# Altium PCB DX-LR20&30_PCB_Footprint_AD.PcbDoc
Units mil, origin at the board's own origin, x right, y up, seen from the top; angles counter-clockwise.
Board outline 6000 x 4000 mil, 2 copper layers (Top Layer, Bottom Layer); 1 components, 0 nets, 22 pads, 0 vias.
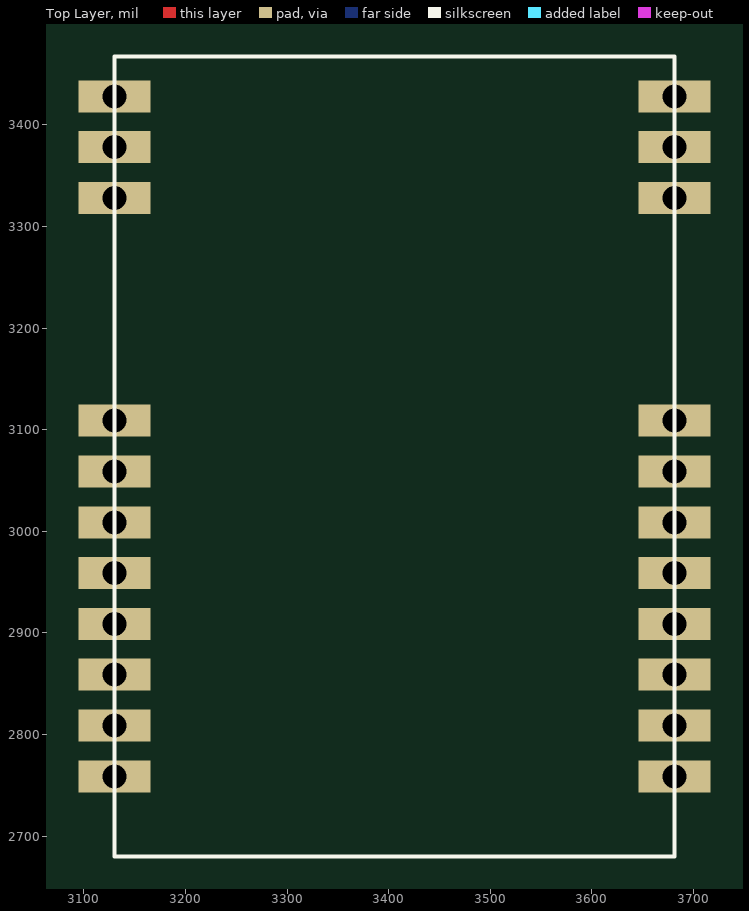
[diagram p0: Top Layer view]
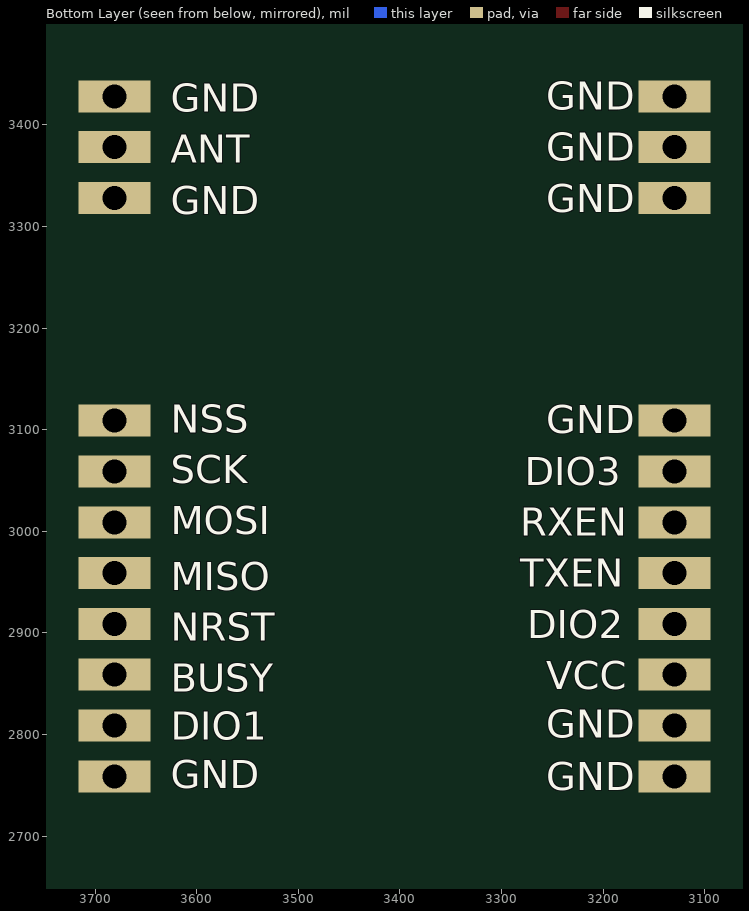
[diagram p1: Bottom Layer view, seen from below]

## Layer stack, top to bottom
Top Solder: solder mask 0.4, Solder Resist, Dk 3.5
Top Layer: signal copper 1.4
Dielectric 1: dielectric 12.6, FR-4, Dk 4.8
Bottom Layer: signal copper 1.4
Bottom Solder: solder mask 0.4, Solder Resist, Dk 3.5

## Board outline
1000,1000 7000,1000 7000,5000 1000,5000

## Design rules (kind name [scope] priority, off if disabled: settings)
Clearance [All] p1: gap=10 ignorepadtopadclearanceinfootprint=FALSE except(0: Arc-Hole Track-Hole SMDPad-Hole THPad-Hole Via-Hole Fill-Hole Poly-Hole Region-Hole Text-Hole)
PolygonConnect [All] p1: connectstyle=Relief reliefconductorwidth=10 reliefentries=4 polygonreliefangle="90 Angle" airgapwidth=10
RoutingVias [All] p1: holewidth=28 width=50 viastyle="Through Hole" minholewidth=28 minwidth=50 maxholewidth=28 maxwidth=50
SolderMaskExpansion [All] p1: expansion=4 istentingtop=FALSE
Width [All] p1: maxlimit=10 minlimit=10 preferedwidth=10
30 further rules are at their usual default settings.

## Components (designator, comment, footprint, x,y, rotation, side; value= is the part's Value field where it differs from the comment)
U? "" PE220-400M22S 3130,3428.03 r90 top

## Footprints (in the part's own frame and the unit in brackets; to place one, negate y for a bottom-side part, rotate by r counter-clockwise, add the part's x,y. Pads: shape width x height; smd on the part's side, far side on the other; paste and mask are expansions set on the pad)
PE220-400M22S [mm] "20mm*14mm*2.8mm-S"
  rect 0.8x1.8 hole 0.6: 1(0,0) 2(-1.27,0) 3(-2.54,0) 4(-8.11,0) 5(-9.38,0) 6(-10.65,0) 7(-11.92,0) 8(-13.19,0) 9(-14.46,0) 10(-15.73,0) 11(-17,0) 12(-17,-14) 13(-15.73,-14) 14(-14.46,-14) 15(-13.19,-14) 16(-11.92,-14) 17(-10.65,-14) 18(-9.38,-14) 19(-8.11,-14) 20(-2.54,-14) 21(-1.27,-14) 22(0,-14)
  silkscreen extent -19,-14 1,0

## Part data
U?: library part LLCC68

## Nets (pads, with @x,y where several pads share a name; then routed paths per layer and width w, separated by ;. In a path a pad name is that pad's centre, name@x,y a point inside that pad or via, vN(x,y) a via of type N, cw(c..) or ccw(c..) an arc to the next point about the centre after c; other vN are vias at no path point)
pads on no net: U?.1 U?.2 U?.3 U?.4 U?.5 U?.6 U?.7 U?.8 U?.9 U?.10 U?.11 U?.12 U?.13 U?.14 U?.15 U?.16 U?.17 U?.18 U?.19 U?.20 U?.21 U?.22

## Text inside footprints (layer, text, board x,y; h text height)
U?: Bottom Overlay "GND" at 3625.83,2746.97 h27.56; Bottom Overlay "DIO1" at 3625.83,2794.57 h27.56; Bottom Overlay "BUSY" at 3625.83,2841.97 h27.56; Bottom Overlay "NRST" at 3625.83,2891.97 h27.56; Bottom Overlay "MISO" at 3625.83,2941.97 h27.56; Bottom Overlay "MOSI" at 3625.83,2996.97 h27.56; Bottom Overlay "SCK" at 3625.83,3046.97 h27.56; Bottom Overlay "NSS" at 3625.83,3096.97 h27.56; Bottom Overlay "GND" at 3625.83,3312.06 h27.56; Bottom Overlay "ANT" at 3625.83,3362.41 h27.56; Bottom Overlay "GND" at 3625.83,3412.76 h27.56; Bottom Overlay "GND" at 3256.27,2744.96 h27.56; Bottom Overlay "GND" at 3256.27,2796.54 h27.56; Bottom Overlay "VCC" at 3256.27,2844.48 h27.56; Bottom Overlay "DIO2" at 3274.59,2894.83 h27.56; Bottom Overlay "TXEN" at 3281.85,2945.18 h27.56; Bottom Overlay "RXEN" at 3281.85,2995.53 h27.56; Bottom Overlay "DIO3" at 3277,3045 h27.56; Bottom Overlay "GND" at 3256.27,3096.23 h27.56; Bottom Overlay "GND" at 3256.27,3314.03 h27.56; Bottom Overlay "GND" at 3256.27,3364.38 h27.56; Bottom Overlay "GND" at 3256.27,3414.73 h27.56